# Altium PCB Wireless power_inverter.PcbDoc
Units mm, origin at the board's own origin, x right, y up, seen from the top; angles counter-clockwise.
Board outline 95.25 x 50.25 mm, 2 copper layers (Top Layer, Bottom Layer); 50 components, 24 nets, 200 pads, 265 vias.
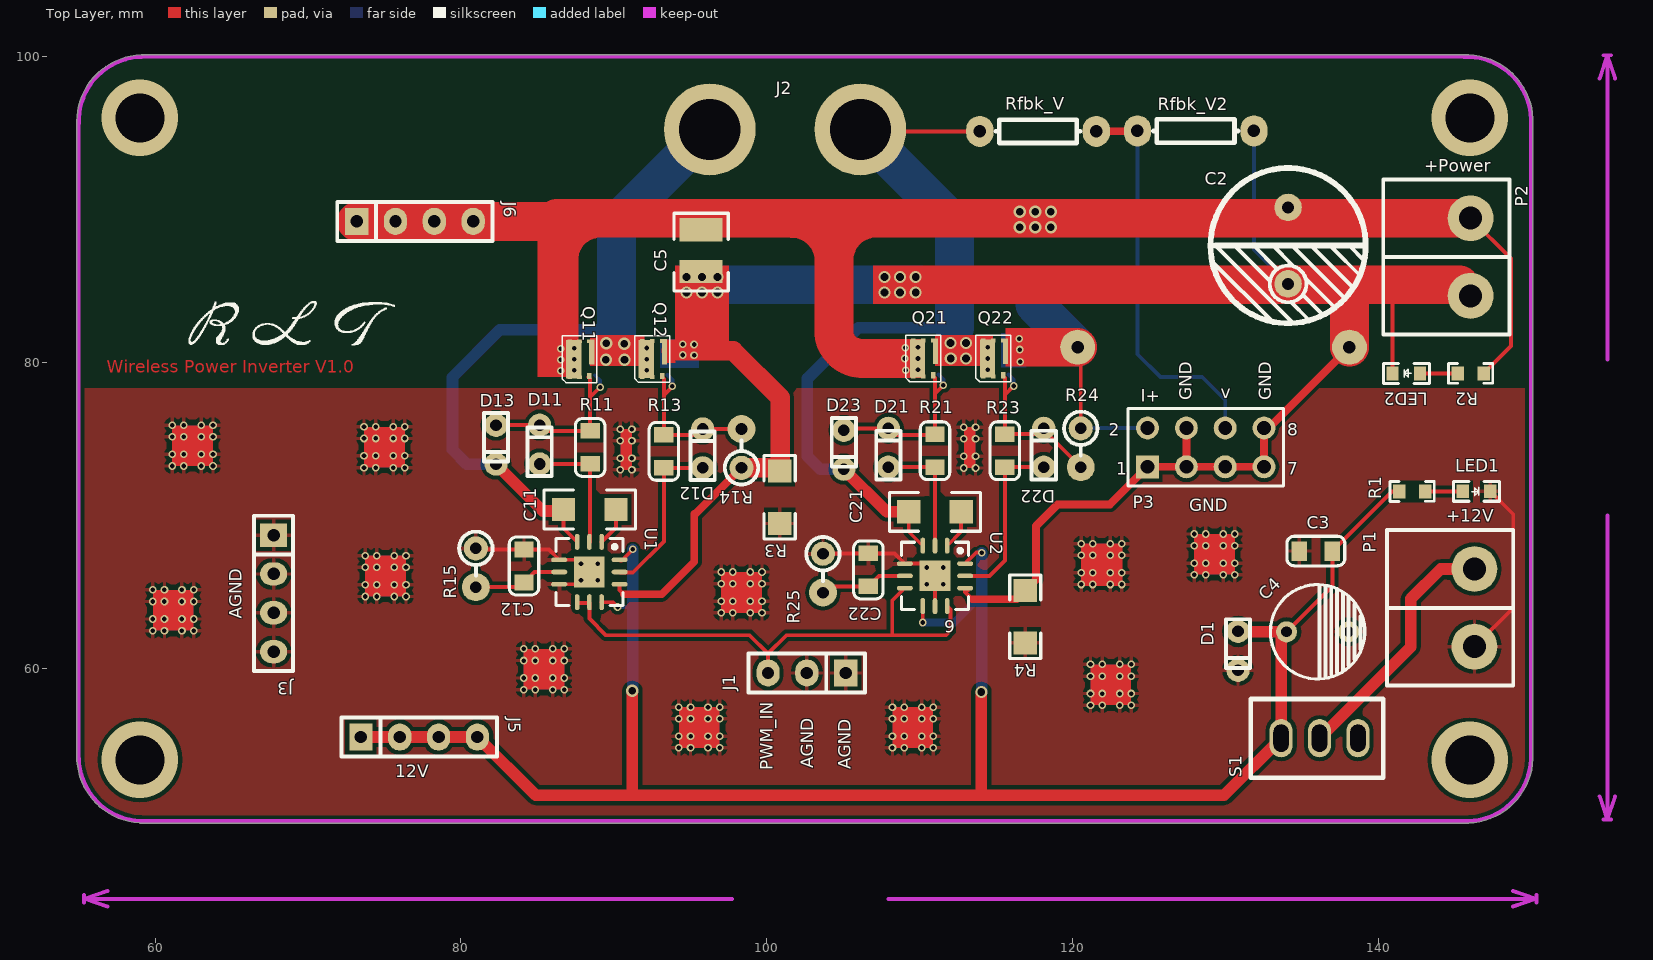
[diagram p0: Top Layer view]
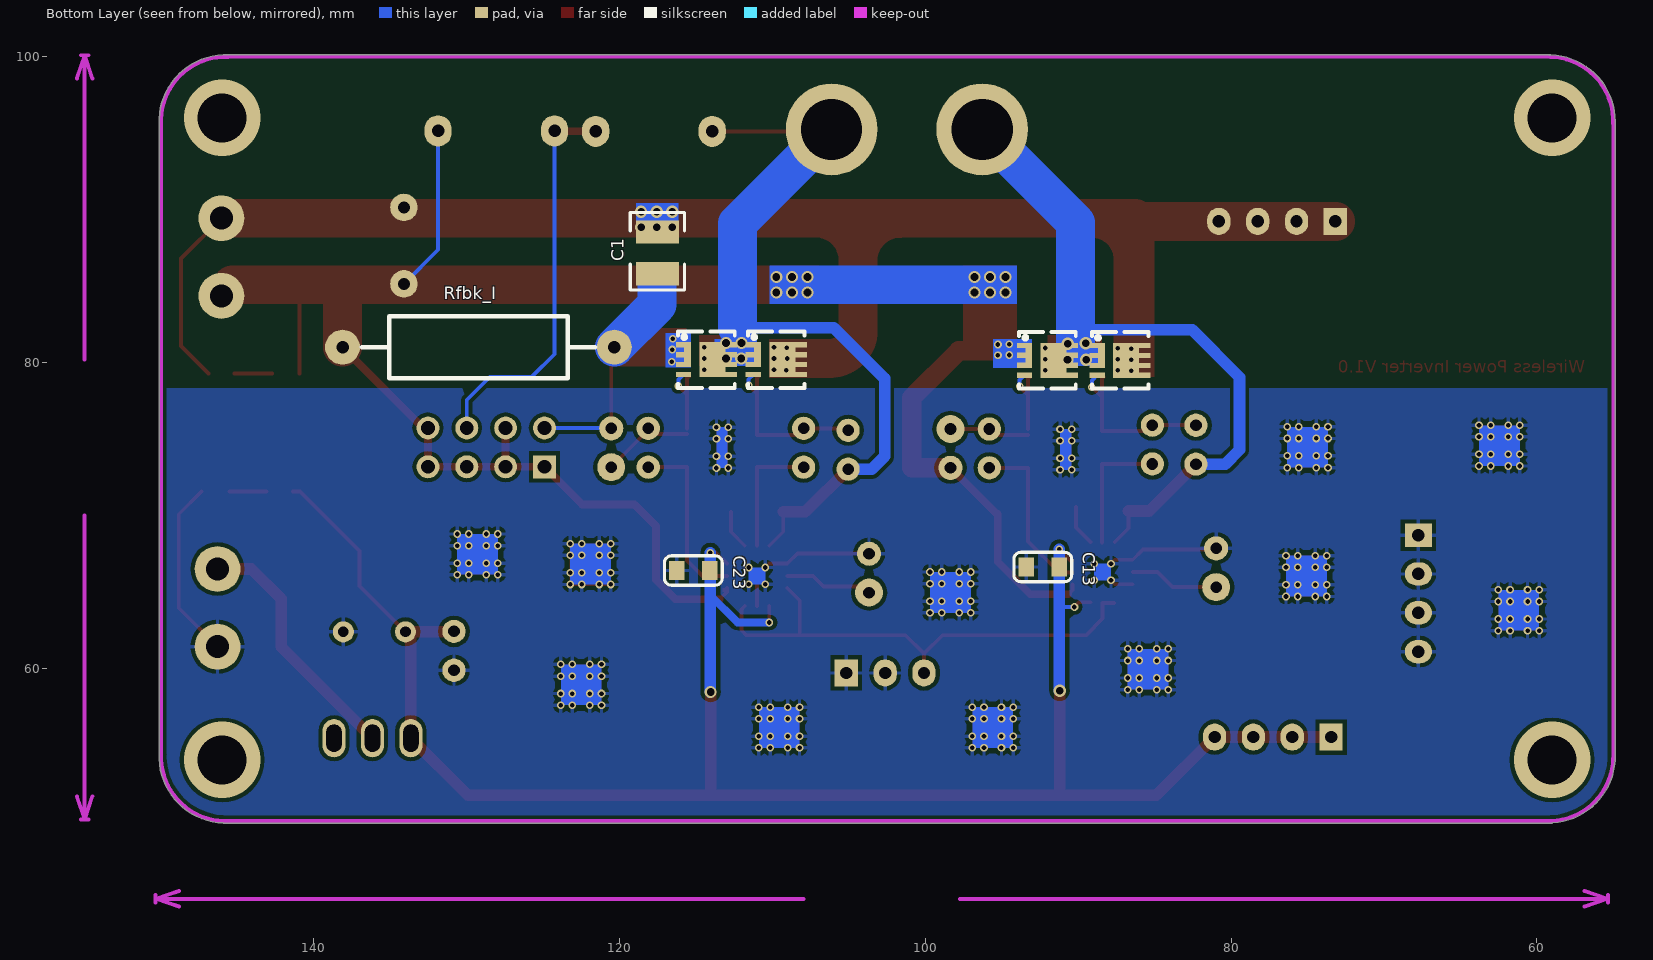
[diagram p1: Bottom Layer view, seen from below]
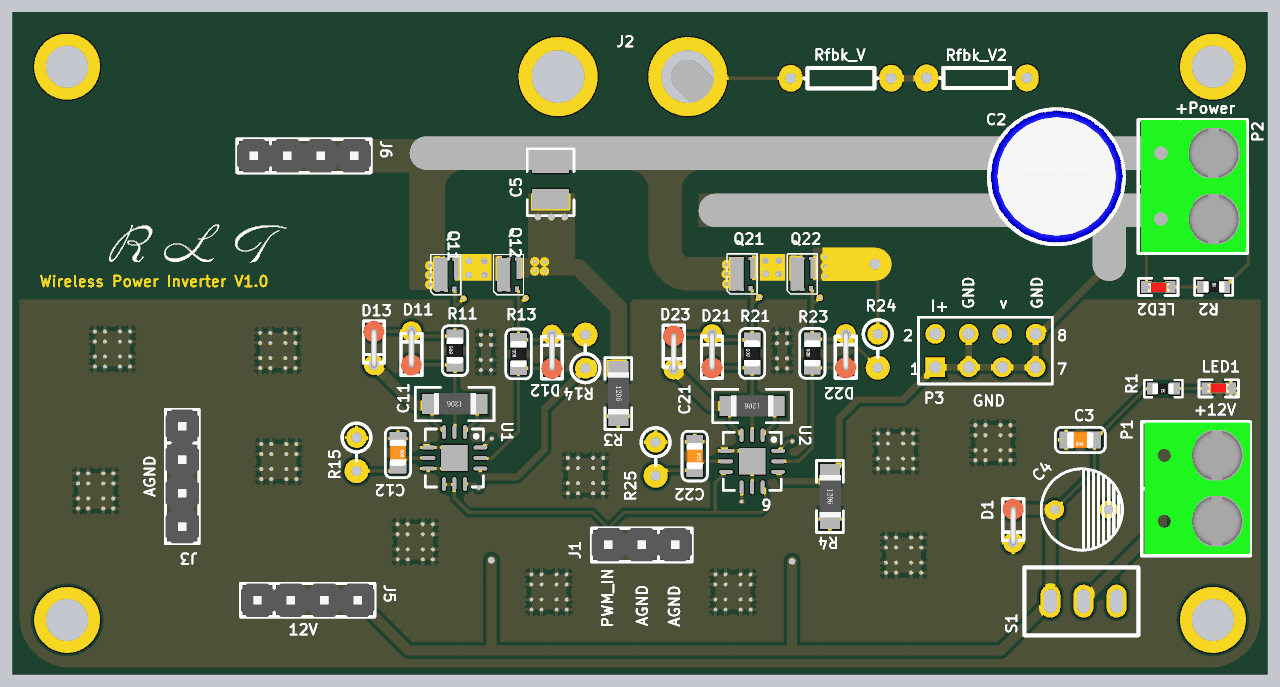
[diagram p2: 3D render of the assembled board from above, using the file's embedded part models]

## Layer stack, top to bottom
Top Solder: solder mask 0.0102, Solder Resist, Dk 3.5
Top Layer: signal copper 0.0356
Dielectric 1: dielectric 0.32, FR-4, Dk 4.8
Bottom Layer: signal copper 0.0356
Bottom Solder: solder mask 0.0102, Solder Resist, Dk 3.5

## Board outline
54.882,53.953 ccw(c59.232,54.232) 58.953,49.882 ccw(c59,50) 59,49.873 145.905,49.873 ccw(c145.905,50) 145.933,49.876 ccw(c145.768,54.232) 150.124,54.067 ccw(c150,54.095) 150.127,54.095 150.127,95.905 ccw(c150,95.905) 150.124,95.933 ccw(c145.768,95.768) 145.933,100.124 ccw(c145.905,100) 145.905,100.127 59.232,100.127 ccw(c59.232,100) 59.161,100.105 ccw(c59.093,99.998) 59.088,100.125 ccw(c59.232,95.768) 54.873,95.768 54.873,54 ccw(c55,54)

## Design rules (kind name [scope] priority, off if disabled: settings)
Clearance [All] p1: gap=0.254 ignorepadtopadclearanceinfootprint=FALSE except(0: Arc-Hole Track-Hole SMDPad-Hole THPad-Hole Via-Hole Fill-Hole Poly-Hole Region-Hole Text-Hole)
PolygonConnect [All] p1: connectstyle=Relief reliefconductorwidth=0.254 reliefentries=4 polygonreliefangle="90 Angle" airgapwidth=0.254
RoutingVias [All] p1: holewidth=0.711 width=1.27 viastyle="Through Hole" minholewidth=0.711 minwidth=1.27 maxholewidth=0.711 maxwidth=1.27
SolderMaskExpansion [All] p1: expansion=0.102 istentingtop=FALSE
Width [All] p1: maxlimit=2.54 minlimit=0.254 preferedwidth=0.254 minimp=50.000000 maximp=50.000000 favimp=50.000000
30 further rules are at their usual default settings.

## Components (designator, comment, footprint, x,y, rotation, side; value= is the part's Value field where it differs from the comment)
C1 "104" 1210 117.526,87.528 r90 bottom
C2 "100UF" CE/10MM 134.112,90.145 r270 top
C3 "Cap" 0805C 137.008,67.666 r180 top
C4 "Cap" CD6 134.01,62.382 r180 top
C5 "104" 1210 95.707,86.97 r270 top
C11 "Cap" 1206 90.145,70.383 r180 top
C12 "Cap" 0805C 84.125,67.767 r270 top
C13 "Cap" 0805C 93.396,66.624 r180 bottom
C21 "Cap" 1206 112.725,70.231 r180 top
C22 "Cap" 0805C 106.655,67.513 r270 top
C23 "Cap" 0805C 116.256,66.396 r180 bottom
D1 "1N4742" 1N4148_Stand 130.835,61.138 r90 top
D11 "BYV26" 1N4148_Stand 85.146,74.634 r270 top
D12 "BYV26" 1N4148_Stand 95.814,74.38 r270 top
D13 "1N4740" 1N4148_Stand 82.296,74.625 r90 top
D21 "BYV26" 1N4148_Stand 107.964,74.422 r270 top
D22 "BYV26" 1N4148_Stand 118.124,74.422 r270 top
D23 "1N4740" 1N4148_Stand 105.054,74.295 r90 top
J1 "PORT" SIP3 102.63,59.69 r180 top
J2 "COIL" COIL 96.28,95.25 r0 top
J3 "CON4" SIP4 67.742,64.897 r270 top
J5 "CON4" SIP4 77.267,55.499 r0 top
J6 "CON4" SIP4 76.987,89.23 r0 top
LED1 "" 0603_LED 145.542,71.572 r0 top
LED2 "" 0603_LED 142.748,79.28 r180 top
P1 "VCC" 050-2 146.304,63.952 r270 top
P2 "POWER" 050-2 146.05,86.9 r270 top
P3 "Header 4X2" HDR2X4 124.917,73.177 r0 top
Q11 "IRL100HS121" MIXMOS 87.757,80.213 r90 top
Q12 "IRL100HS121" MIXMOS 92.512,80.222 r90 top
Q21 "IRL100HS121" MIXMOS 110.25,80.264 r90 top
Q22 "IRL100HS121" MIXMOS 114.822,80.264 r90 top
R1 "2K" 0603-R 143.51,71.064 r180 top
R2 "2K" 0603-R 144.78,79.788 r0 top
R3 "Res2" 1206R 100.852,72.898 r270 top
R4 "Res2" 1206R 116.916,65.086 r270 top
R11 "Res2" 0805R 88.448,73.364 r90 top
R13 "Res2" 0805R 93.274,73.11 r90 top
R14 "Res2" AXIAL0.1Z 98.354,73.11 r90 top
R15 "Res2" AXIAL0.1Z 80.975,67.843 r270 top
R21 "Res2" 0805R 111.012,73.152 r90 top
R23 "Res2" 0805R 115.584,73.152 r90 top
R24 "Res2" AXIAL0.1Z 120.548,75.692 r270 top
R25 "Res2" AXIAL0.1Z 103.683,67.488 r270 top
Rfbk_I "R05 0.1%" AXIAL0.7 129.235,81.001 r180 bottom
Rfbk_V "300K 0.1%" AXIAL0.3 117.754,95.123 r180 top
Rfbk_V2 "300K 0.1%" AXIAL0.3 128.067,95.148 r180 top
S1 "switch1" Switch_8.2*5.2 136.169,55.423 r90 top
U1 "MAX5064BATC+" QFN80P400X400X100_HS-13M 88.406,66.294 r270 top
U2 "MAX5064BATC+" QFN80P400X400X100_HS-13M 111.012,66.04 r270 top

## Footprints (in the part's own frame and the unit in brackets; to place one, negate y for a bottom-side part, rotate by r counter-clockwise, add the part's x,y. Pads: shape width x height; smd on the part's side, far side on the other; paste and mask are expansions set on the pad)
1N4148_Stand [mil]
  round 60 hole 30: 1(-50,0) 2(50,0)
  silkscreen extent -44,-31 81,31, body extent -58,-32 82,32, height 186
050-2 [mm]
  round 3 hole 1.5: 1(-2.54,0) 2(2.54,0)
  silkscreen extent -5.08,-5.72 5.08,2.54, body extent -5.04,-5.5 4.96,2.5, height 11.2
0603-R [mm]
  rect 0.8x0.9 smd: 1(0.425,-0.5) 2(2.125,-0.5)
  silkscreen extent -0.17,-1.15 2.73,0.15, body extent 0.5,-0.88 2.1,-0.08, height 0.3
0603_LED [mm]
  rect 0.8x0.9 smd: 1(0,0) 2(1.8,0)
  silkscreen extent -0.6,-0.65 2.4,0.65, body extent 0.05,-0.37 1.67,0.43, height 0.6
0805C [mil]
  rect 40x50 smd: 1(0,0) 2(85,0)
  silkscreen extent -32,-38 117,38, body extent 3,-25 82,25, height 30
0805R [mil]
  rect 40x50 smd: 1(0,0) 2(85,0)
  silkscreen extent -32,-38 117,38, body extent 3,-25 82,25, height 30
1206 [mil]
  rect 60x60 smd: 1(0,0) 2(135,0)
  silkscreen extent -50,-50 185,50, body extent 4,-32 130,31, height 24
1206R [mil]
  rect 60x60 smd: 1(0,0) 2(135,0)
  silkscreen extent -40,-40 175,40, body extent 4,-30 130,33, height 24
1210 [mil]
  rect 60x110 smd: 1(-67.5,0) 2(40,0)
  silkscreen extent -110,-70 90,70
AXIAL0.1Z [mil]
  round 62 hole 30: 1(0,0)
  round 72 hole 30: 2(100,0)
  silkscreen extent -43,-43 70,43
AXIAL0.3 [mil]
  oval 70x80 hole 32: 1(-150,0) 2(150,0)
  silkscreen extent -109,-30 109,30
AXIAL0.7 [mil]
  round 90 hole 32: 1(-350,0) 2(350,0)
  silkscreen extent -300,-80 300,80
CD6 [mm]
  round 1.38 hole 0.7: 1(0,0) 2(-4.064,0)
  silkscreen extent -5.12,-3.09 1.06,3.09
CE/10MM [mm]
  round 1.8 hole 0.8: 1(0,0) 2(5,0)
  silkscreen extent -2.58,-5.08 7.58,5.08, body extent -2.55,-5 7.5,5.05, height 16.53
COIL [mm]
  round 6 hole 4: 1(0,0) 2(9.85,0)
HDR2X4 [mm] "Connector; Header; 4x2 Position"
  rect 1.5x1.5 hole 0.9: 1(0,0)
  round 1.5 hole 0.9: 2(0,2.54) 3(2.54,0) 4(2.54,2.54) 5(5.08,0) 6(5.08,2.54) 7(7.62,0) 8(7.62,2.54)
  silkscreen extent -1.27,-1.27 8.89,3.81
MIXMOS [mm]
  rect 0.25x0.3 smd: 1(-1.175,0) 1(-1.175,0.65) 1(1.175,0) 1(1.175,0.65) 3(1.175,-0.65)
  rect 0.34x0.8 smd far side: 1(-1.05,2.1) 1(-0.4,2.1) 1(0.25,2.1) 1(0.9,2.1) 3(-0.4,-1.1) 3(0.25,-1.1) 3(0.9,-1.1)
  rect 2.29x1.71 smd far side: 1(-0.075,0.895)
  rect 2.5x1 smd: 1(0,0.381)
  rect 0.4x0.3 smd: 2(-1.1,-0.65)
  rect 0.34x1 smd far side: 2(-1.05,-1)
  rect 1.64x0.45 smd far side: 3(0.25,-0.725)
  rect 1.65x0.35 smd: 3(0.475,-0.8)
  silkscreen extent -1.52,-1.14 1.52,1.14
QFN80P400X400X100_HS-13M [mm] "QFN, 12-Leads, Body 4.00x4.00mm, Pitch 0.80mm, Thermal Pad 2.00x2.00mm, IPC Low Density"
  oval 1.05x0.3 smd: 1(-1.975,0.8) 2(-1.975,0) 3(-1.975,-0.8) 7(1.975,-0.8) 8(1.975,0) 9(1.975,0.8)
  oval 0.3x1.05 smd: 4(-0.8,-1.975) 5(0,-1.975) 6(0.8,-1.975) 10(0.8,1.975) 11(0,1.975) 12(-0.8,1.975)
  rect 2x2 smd: 4(0,0)
  silkscreen extent -2.2,-2.2 2.2,2.2
SIP3 [mil]
  rect 60x70 hole 32: 1(-100,0)
  oval 60x70 hole 32: 2(0,0) 3(100,0)
  silkscreen extent -150,-50 150,50, body extent -150,-51 150,49, height 336
SIP4 [mil]
  rect 60x70 hole 32: 1(-150,0)
  oval 60x70 hole 32: 2(-50,0) 3(50,0) 4(150,0)
  silkscreen extent -200,-50 200,50, body extent -200,-50 200,50, height 336
Switch_8.2*5.2 [mm]
  oval 2.5x1.5 hole 1 slot 1.8 at 0 deg: 1(0,2.515) 2(0,0) 3(0,-2.515)
  silkscreen extent -2.59,-4.17 2.57,4.5

## Part data
C1 C5: library part CBB
C2: library part ELECTRO1, "电解电容"
C3 C4 C11 C12 C13 C21 C22 C23: "Capacitor"
D1 D13 D23: library part "D Zener", "Zener Diode"
D11 D12 D21 D22: library part "Diode 1N4007", "1 Amp General Purpose Rectifier"
J2: library part CON2, "Connector"
J3 J5 J6: "Connector"
LED1 LED2: library part LED2, "Typical RED, GREEN, YELLOW, AMBER GaAs LED"
P1: library part POWER
P3: "Header, 4-Pin, Dual row"
R1 R2: library part RES
R3 R4 R11 R13 R14 R15 R21 R23 R24 R25: "Resistor"
Rfbk_I Rfbk_V Rfbk_V2: library part Res2, "Resistor"

## Via types
v1: diameter 0.5, hole 0.3, Top Layer to Bottom Layer, tented both sides, 204 vias
v2: diameter 0.5, hole 0.3, Top Layer to Bottom Layer, 29 vias
v3: diameter 0.8, hole 0.5, Top Layer to Bottom Layer, tented both sides, 28 vias
v4: diameter 5, hole 3.2, Top Layer to Bottom Layer, 4 vias

## Nets (pads, with @x,y where several pads share a name; then routed paths per layer and width w, separated by ;. In a path a pad name is that pad's centre, name@x,y a point inside that pad or via, vN(x,y) a via of type N, cw(c..) or ccw(c..) an arc to the next point about the centre after c; other vN are vias at no path point)
+12: C3.1 C4.1 C13.2 C23.2 D1.2 J5.1 J5.2 J5.3 J5.4 R1.2 S1.1 U1.9 U1.12 U2.7 U2.12 | length 128.2
  Top Layer w0.254: U1.9 89.935,64.319 v1(90.246,64.008) ; U1.12@90.423,67.052 90.518,67.052 v1(91.242,67.776) ; v1@110.212,62.993 U2.7 ; U2.12 113.711,67.564 v1(114.06,67.564) ; C4.1 137.008,65.38 C3.1 140.906,71.564 R1.2
  Top Layer w0.762: J5.1 J5.2 J5.3 J5.4 84.887,51.689 129.921,51.689 S1.1 133.655,62.027 C4.1 130.861,62.382 D1.2 ; 91.211,51.816 v3(91.211,58.522) ; 114.046,51.765 v3(114.046,58.445)
  Bottom Layer w0.254: v1(90.246,64.008) 91.166,64.008 91.242,64.084
  Bottom Layer w0.508: v1(110.211,62.992) 112.282,62.992 114.06,64.77
  Bottom Layer w0.762: v3@91.242,58.522 91.242,64.084 v1(91.242,67.776) ; v3@114.06,58.445 114.06,64.77 v1(114.06,67.564)
AGND: C3.2 C4.2 C12.1 C13.1 C22.1 C23.1 D1.1 J1.1 J1.2 J3.1 J3.2 J3.3 J3.4 LED1.2 P1.2 R3.2 R4.2 R15.1 R25.1 U1.4 U1.6 U2.4 U2.8 | length 28.6
  Top Layer w0.254: R15.1@81.051,67.767 C12.1 85.758,67.767 86.431,67.094 U1.4@87.606,67.094 ; U1.6 U1.4@87.606,65.494 ; R25.1 103.708,67.513 C22.1 108.364,67.513 109.037,66.84 U2.4@110.212,66.84 ; U2.8 U2.4@111.012,66.04 ; P1.2 148.844,63.952 148.844,70.07 LED1.2
  other v1: 94.259,54.788 95.021,54.788 96.164,54.788 96.926,54.788 108.229,54.788 108.991,54.788 110.134,54.788 110.896,54.788 94.259,55.55 95.021,55.55 96.164,55.55 96.926,55.55 108.229,55.55 108.991,55.55 110.134,55.55 110.896,55.55 94.259,56.693 95.021,56.693 96.164,56.693 96.926,56.693 108.229,56.693 108.991,56.693 110.134,56.693 110.896,56.693 94.259,57.455 95.021,57.455 96.164,57.455 96.926,57.455 108.229,57.455 108.991,57.455 110.134,57.455 110.896,57.455 121.183,57.582 121.945,57.582 123.088,57.582 123.85,57.582 121.183,58.344 121.945,58.344 123.088,58.344 123.85,58.344 84.099,58.598 84.861,58.598 86.004,58.598 86.766,58.598 84.099,59.36 84.861,59.36 86.004,59.36 86.766,59.36 121.183,59.487 121.945,59.487 123.088,59.487 123.85,59.487 121.183,60.249 121.945,60.249 123.088,60.249 123.85,60.249 84.099,60.503 84.861,60.503 86.004,60.503 86.766,60.503 84.099,61.265 84.861,61.265 86.004,61.265 86.766,61.265 59.842,62.459 60.604,62.459 61.747,62.459 62.509,62.459 59.842,63.221 60.604,63.221 61.747,63.221 62.509,63.221 97.028,63.627 97.79,63.627 98.933,63.627 99.695,63.627 59.842,64.364 60.604,64.364 61.747,64.364 62.509,64.364 97.028,64.389 97.79,64.389 98.933,64.389 99.695,64.389 73.736,64.694 74.498,64.694 75.641,64.694 76.403,64.694 59.842,65.126 60.604,65.126 61.747,65.126 62.509,65.126 73.736,65.456 74.498,65.456 75.641,65.456 76.403,65.456 110.462,65.49 111.562,65.49 120.574,65.481 121.336,65.481 122.479,65.481 123.241,65.481 97.028,65.532 97.79,65.532 98.933,65.532 99.695,65.532 87.856,65.744 88.956,65.744 127.965,66.116 128.727,66.116 129.87,66.116 130.632,66.116 120.574,66.243 121.336,66.243 122.479,66.243 123.241,66.243 97.028,66.294 97.79,66.294 98.933,66.294 99.695,66.294 73.736,66.599 74.498,66.599 75.641,66.599 76.403,66.599 110.462,66.59 111.562,66.59 87.856,66.844 88.956,66.844 127.965,66.878 128.727,66.878 129.87,66.878 130.632,66.878 73.736,67.361 74.498,67.361 75.641,67.361 76.403,67.361 120.574,67.386 121.336,67.386 122.479,67.386 123.241,67.386 127.965,68.021 128.727,68.021 129.87,68.021 130.632,68.021 120.574,68.148 121.336,68.148 122.479,68.148 123.241,68.148 127.965,68.783 128.727,68.783 129.87,68.783 130.632,68.783 90.424,72.974 91.186,72.974 112.903,73.101 113.665,73.101 73.66,73.127 74.422,73.127 75.565,73.127 76.327,73.127 61.112,73.228 61.874,73.228 63.017,73.228 63.779,73.228 90.424,73.736 91.186,73.736 112.903,73.863 113.665,73.863 73.66,73.889 74.422,73.889 75.565,73.889 76.327,73.889 61.112,73.99 61.874,73.99 63.017,73.99 63.779,73.99 90.424,74.879 91.186,74.879 112.903,75.006 113.665,75.006 73.66,75.032 74.422,75.032 75.565,75.032 76.327,75.032 61.112,75.133 61.874,75.133 63.017,75.133 63.779,75.133 90.424,75.641 91.186,75.641 112.903,75.768 113.665,75.768 73.66,75.794 74.422,75.794 75.565,75.794 76.327,75.794 61.112,75.895 61.874,75.895 63.017,75.895 63.779,75.895
GND: C2.2 C5.2 LED2.2 P2.2 P3.1 P3.3 P3.4 P3.5 P3.7 P3.8 Q12.3 R3.1 R4.1 R14.1 Rfbk_I.1 Rfbk_V2.1 U1.10 U2.10 | length 125.3
  Top Layer w0.254: U1.10 90.381,65.127 90.661,64.846 ; U2.10 112.987,64.991 113.462,64.516 ; LED2.2 140.948,84.338
  Top Layer w0.508: 90.661,64.846 93.138,64.846 95.264,66.972 95.264,70.104 95.348,70.104 R14.1 ; 113.462,64.516 116.346,64.516 117.616,65.786 117.616,69.305 119.024,70.714 122.453,70.714 P3.1 P3.3 ; P3.4 P3.3 ; P3.8 P3.7 P3.5 P3.3 ; P3.8@132.842,75.717 Rfbk_I.1
  Top Layer w1.27: 93.74,80.772 97.804,80.772 100.894,77.682 R3.1@100.894,73.406 ; R14.1 R3.1@100.894,73.11
  Top Layer w2.54: 108.218,85.09 145.32,85.09 P2.2 ; Rfbk_I.1 138.125,85.039
  Bottom Layer w0.254: Rfbk_V2.1 131.877,87.38 C2.2
  other v2: 95.25,80.467 94.513,80.493 95.25,81.178 94.513,81.204
  other v3: 94.756,84.582 95.772,84.582 96.788,84.582 107.71,84.582 108.726,84.582 109.742,84.582 94.756,85.598 95.772,85.598 96.788,85.598 107.71,85.598 108.726,85.598 109.742,85.598
NetC1_1: C1.1 P3.2 Q22.3 R24.1 Rfbk_I.2 | length 18
  Top Layer w0.254: R24.1 Rfbk_I.2@120.548,80.797
  Top Layer w2.54: 116.891,81.001 Rfbk_I.2
  Bottom Layer w0.254: R24.1 120.574,75.717 P3.2
  Bottom Layer w2.54: 117.551,84.887 117.551,83.795 Rfbk_I.2
  other v2: 116.586,80.061 116.561,80.848 116.535,81.559
NetC11_1: C11.1 U1.1 | length 2.7
  Top Layer w0.254: U1.1 90.145,69.208 C11.1@90.145,70.561
NetC11_2: C11.2 D13.1 J2.1 Q11.3 Q12.1 U1.3 | length 45.2
  Top Layer w0.254: C11.2@86.716,70.282 86.716,69.159 U1.3
  Top Layer w0.762: D13.1 85.369,70.282 C11.2@86.716,70.282
  Bottom Layer w0.762: D13.1 80.391,73.355 79.451,74.295 79.451,79.045 82.55,82.144 90.373,82.144 ; 89.865,80.747 Q12.1@90.17,81.051
  Bottom Layer w2.54: Q12.1@90.17,81.28 90.17,89.14 J2.1
  other v2: 92.162,79.497 92.162,80.222 92.162,80.947
  other v3: 89.484,80.188 90.703,80.188 90.678,81.229 89.51,81.255
NetC12_2: C12.2 R15.2 U1.5 | length 5.9
  Top Layer w0.254: R15.2 83.82,65.303 C12.2 84.811,66.294 U1.5
NetC21_1: C21.1 U2.1 | length 2.6
  Top Layer w0.254: U2.1 112.725,68.928 C21.1
NetC21_2: C21.2 D23.1 J2.2 Q21.3 Q22.1 Rfbk_V.2 U2.3 | length 50
  Top Layer w0.254: J2.2@106.257,95.123 Rfbk_V.2 ; C21.2 109.296,68.931 U2.3
  Top Layer w0.762: D23.1 107.848,70.231 C21.2
  Bottom Layer w0.762: 102.667,78.969 102.667,73.863 103.505,73.025 D23.1 ; 102.718,78.994 105.994,82.271 112.282,82.271
  Bottom Layer w2.54: J2.2 112.282,89.098 112.282,82.271
  other v2: 114.472,79.539 114.472,80.264 114.472,80.989
  other v3: 112.039,80.264 113.044,80.264 112.028,81.28 113.044,81.28
NetC22_2: C22.2 R25.2 U2.5 | length 5.2
  Top Layer w0.254: R25.2@104.089,65.354 C22.2 107.34,66.04 U2.5
NetD11_1: D11.1 D13.2 Q11.2 R11.2 | length 11.7
  Top Layer w0.254: D13.2@82.352,75.904 D11.1 85.527,75.523 R11.2 88.448,77.729 ; Q11.2@88.336,79.047 88.448,78.935 88.448,77.729 ; v2(89.103,78.384) 88.448,77.729
  Bottom Layer w0.254: Q11.2@88.757,79.163 89.103,78.817 v2(89.103,78.384)
NetD11_2: D11.2 R11.1 U1.2 | length 8.4
  Top Layer w0.254: D11.2 R11.1 U1.2@88.448,68.227
NetD12_1: D12.1 Q12.2 R13.2 R14.2 | length 9.8
  Top Layer w0.254: Q12.2@93.162,79.047 93.274,78.935 93.274,77.882 ; R13.2 D12.1@95.433,75.269 ; R13.2@93.274,75.65 93.274,77.882 ; v2(93.828,78.435) 93.274,77.882 ; D12.1 R14.2
  Bottom Layer w0.254: Q12.2@93.512,79.172 93.828,78.856 v2(93.828,78.435)
NetD12_2: D12.2 R13.1 U1.11 | length 11.1
  Top Layer w0.254: U1.11@90.423,66.252 91.242,66.252 93.274,68.284 R13.1 D12.2
NetD21_1: D21.1 D23.2 Q21.2 R21.2 | length 11.8
  Top Layer w0.254: D23.2@104.916,75.692 D21.1 108.396,75.26 111.012,75.26 R21.2 111.012,77.967 ; Q21.2@110.9,79.089 Q21.2@111.012,78.977 ; Q21.2@111.012,78.994 Q21.2@111.012,78.977 ; v2(111.557,78.511) 111.012,77.967 ; 111.012,77.967 Q21.2@111.012,78.977
  Bottom Layer w0.254: Q21.2@111.25,79.214 111.557,78.907 v2(111.557,78.511)
NetD21_2: D21.2 R21.1 U2.2 | length 8.2
  Top Layer w0.254: D21.2 R21.1 U2.2
NetD22_1: D22.1 Q22.2 R23.2 R24.2 | length 11.5
  Top Layer w0.254: Q22.2@115.472,79.089 115.584,78.977 115.584,77.89 ; R23.2 D22.1@117.743,75.311 ; R23.2@115.584,75.692 115.584,77.89 ; v2(116.154,78.461) 115.584,77.89 ; D22.1@117.489,75.692 D22.1 118.124,75.576 R24.2
  Bottom Layer w0.254: Q22.2@115.822,79.214 116.154,78.882 v2(116.154,78.461)
NetD22_2: D22.2 R23.1 U2.11 | length 11.7
  Top Layer w0.254: U2.11 114.568,66.04 115.584,67.056 R23.1 D22.2
NetJ1_3: J1.3 U1.7 U1.8 U2.6 U2.9 | length 33.4
  Top Layer w0.254: U1.7@87.648,64.277 88.406,64.277 88.406,63.246 89.498,62.154 98.896,62.154 100.09,60.96 ; J1.3 100.09,60.96 ; 108.218,62.154 108.218,64.421 U2.6 ; U2.9 112.028,63.849 112.028,62.484 111.698,62.154 101.284,62.154 100.09,60.96
NetLED1_1: LED1.1 R1.1 | length 2.4
  Top Layer w0.254: R1.1 LED1.1@145.534,71.564
NetLED2_1: LED2.1 R2.1 | length 2.4
  Top Layer w0.254: LED2.1 R2.1@145.198,79.28
NetP1_1: P1.1 S1.2 | length 16.6
  Top Layer w0.762: S1.2 142.138,61.392 142.138,64.541 144.089,66.492 P1.1
NetP3_6: P3.6 Rfbk_V2.2 Rfbk_V.1 | length 26.1
  Top Layer w0.508: Rfbk_V.1 Rfbk_V2.2@124.231,95.123
  Bottom Layer w0.254: Rfbk_V2.2 124.257,80.543 125.755,79.045 128.499,79.045 129.997,77.546 P3.6
POWER: C1.2 C2.1 C5.1 J6.1 J6.2 J6.3 J6.4 P2.1 Q11.1 Q21.1 R2.2 | length 96.1
  Top Layer w0.254: P2.1 148.692,86.798 148.692,81.074 R2.2
  Top Layer w0.686: 87.325,86.69 cw(c89.154,86.69) 89.154,88.519 ; 101.651,88.494 cw(c101.651,86.665) 103.48,86.665 ; 105.334,86.69 cw(c107.163,86.69) 107.163,88.519
  Top Layer w2.54: J6.1 J6.2 J6.3 J6.4 86.074,89.23 ; 86.284,89.44 P2.1 ; 104.394,82.093 ccw(c106.223,82.093) 106.223,80.264
  other v2: 86.538,79.451 87.407,79.488 109.093,79.502 109.9,79.539 86.538,80.188 87.407,80.213 109.042,80.264 109.9,80.264 86.538,80.899 87.407,80.938 109.068,80.975 109.9,80.989
  other v3: 116.561,88.849 117.577,88.849 118.593,88.849 116.561,89.865 117.577,89.865 118.593,89.865
pads on no net: S1.3
copper on no net:
  other v4: 59,54 146,54 59,96 146,96

## Polygon pours and split planes (outlines as drawn)
AGND on Bottom Layer "Bottom Layer-No Net" (solid, remove dead copper, pour order 8): 54.991,78.308 149.555,78.308 149.733,78.308 150.393,77.648 150.317,77.572 150.317,48.489 52.959,48.489 52.807,48.336
AGND on Top Layer "Bottom Layer-No Net" (solid, remove dead copper, pour order 10): 55.372,78.308 149.606,78.308 149.606,49.073 151.232,47.447 150.927,47.752 50.267,47.752

## Keep-outs
Keep-Out Layer:
  lines w0.254: 55,54 55,95.768 ; 55.002,54.093 ccw(c59.232,54.232) 59.372,50.002 ; 55.002,95.628 cw(c59.232,95.768) 59.093,99.998 ; 55.35,44.66 55.35,45.168 ; 56.874,44.406 55.35,44.914 ; 56.874,45.422 55.35,44.914 ; 59,50 145.905,50 ; 59.232,100 145.905,100 ; 97.746,44.914 55.35,44.914 ; 107.954,44.914 150.35,44.914 ; 145.628,99.998 cw(c145.768,95.768) 149.998,95.907 ; 145.907,50.002 ccw(c145.768,54.232) 149.998,54.372 ; 148.826,44.406 150.35,44.914 ; 148.826,45.422 150.35,44.914 ; 150,54.095 150,95.905 ; 150.35,44.66 150.35,45.168 ; 154.492,51.628 155,50.104 ; 154.492,98.58 155,100.104 ; 154.746,50.104 155.254,50.104 ; 154.746,100.104 155.254,100.104 ; 155,70 155,50.104 ; 155,80.208 155,100.104 ; 155.508,51.628 155,50.104 ; 155.508,98.58 155,100.104
  text "50 (mm)" at 155.914,70.254 h1.52 r90
  text "95 (mm)" at 98,44 h1.52

## Other copper
Top Layer:
  rectangle net AGND: 112.903,73.101 113.665,75.768
  rectangle net AGND: 90.424,72.974 91.186,75.641
  rectangle net AGND: 59.842,62.459 62.509,65.126
  rectangle net AGND: 61.112,73.228 63.779,75.895
  rectangle net AGND: 73.66,73.127 76.327,75.794
  rectangle net AGND: 84.099,58.598 86.766,61.265
  rectangle net AGND: 94.259,54.788 96.926,57.455
  rectangle net GND: 112.987,64.973 113.284,65.24
  rectangle net AGND: 108.229,54.788 110.896,57.455
  rectangle net POWER: 106.096,78.994 110.236,81.534
  rectangle net GND: 93.994,80.264 97.55,83.82
  rectangle net GND: 93.994,83.82 97.55,86.36
  rectangle net GND: 106.948,83.82 109.742,86.36
  rectangle net POWER: 103.138,81.966 105.678,90.583
  rectangle net POWER: 85,79.047 87.686,89.44
  region net NetC21_2: 114.822,79.756 114.822,81.788 111.012,81.788 111.012,79.756
  region net GND: 94.036,79.968 94.036,81.492 93.274,81.492 93.274,79.968
  region net NetC11_2: 92.004,79.756 92.004,81.788 88.448,81.788 88.448,79.756
  rectangle net AGND: 127.965,66.116 130.632,68.783
  rectangle net AGND: 73.736,64.694 76.403,67.361
  rectangle net AGND: 120.574,65.38 123.292,68.148
  rectangle net AGND: 97.028,63.627 99.695,66.294
  rectangle net AGND: 121.183,57.582 123.85,60.249
  rectangle net NetC1_1: 115.622,79.731 116.891,82.271
  text "Wireless Power Inverter V1.0" at 56.82,79.324 h0.8
Bottom Layer:
  rectangle net GND: 93.015,79.654 95.58,81.534
  rectangle net NetC1_1: 115.341,79.68 116.992,81.94
  rectangle net NetC11_2: 88.417,79.756 89.179,81.255
  rectangle net AGND: 112.928,73.101 113.665,75.768
  rectangle net AGND: 90.449,72.974 91.186,75.641
  rectangle net AGND: 59.842,62.459 62.509,65.126
  rectangle net AGND: 61.112,73.228 63.779,75.895
  rectangle net AGND: 73.66,73.127 76.327,75.794
  rectangle net AGND: 84.099,58.598 86.766,61.265
  rectangle net AGND: 94.259,54.788 96.926,57.455
  rectangle net AGND: 108.229,54.788 110.896,57.455
  rectangle net GND: 93.994,83.82 110.109,86.36
  rectangle net GND: 93.994,83.82 97.55,86.36
  rectangle net GND: 106.948,83.82 110.211,86.36
  rectangle net NetC21_2: 111.012,79.756 113.806,81.534
  rectangle net NetC11_2: 88.914,79.756 91.454,81.788
  rectangle net AGND: 127.965,66.116 130.632,68.783
  rectangle net AGND: 120.574,65.481 123.241,68.148
  rectangle net AGND: 121.183,57.582 123.85,60.249
  rectangle net AGND: 97.028,63.627 99.695,66.294
  rectangle net AGND: 73.736,64.694 76.403,67.361
  rectangle net AGND: 87.856,65.744 88.956,66.844
  rectangle net AGND: 110.462,65.49 111.562,66.59
  rectangle net POWER: 116.154,88.265 118.923,90.449

## Silkscreen, mask and mechanical layers (free items; w line width, h text height)
Top Overlay:
  drawing of 784 lines, arcs and shapes, not listed
  text "+Power" at 143.027,92.481 h0.8
  text "v" at 129.692,77.673 h0.8
  text "GND" at 127.813,77.521 h0.8 r90
  text "GND" at 133.02,77.521 h0.8 r90
  text "I+" at 124.46,77.445 h0.8
  text "GND" at 127.66,70.256 h0.8
  text "+12V" at 144.45,69.571 h0.8
  text "AGND" at 65.659,63.246 h0.8 r90
  text "9" at 111.608,62.332 h0.8
  text "AGND" at 103.048,53.442 h0.8 r90
  text "AGND" at 105.486,53.391 h0.8 r90
  text "PWM_IN" at 100.406,53.34 h0.8 r90
  text "12V" at 75.717,52.883 h0.8
Top Solder:
  region: 113.513,79.756 113.513,81.788 111.608,81.788 111.608,79.756
  region: 91.211,79.756 91.211,81.788 89.002,81.788 89.002,79.756
  rectangle: 116.357,79.731 120.371,82.271
  text "Wireless Power Inverter V1.0" at 56.82,79.324 h0.8

## Text inside footprints (layer, text, board x,y; h text height)
P3: Top Overlay "2" at 122.377,75.209 h0.8; Top Overlay "1" at 122.885,72.669 h0.8; Top Overlay "7" at 134.061,72.669 h0.8; Top Overlay "8" at 134.061,75.209 h0.8